# Altium PCB PCB1.PcbDoc
Units mm, origin at the board's own origin, x right, y up, seen from the top; angles counter-clockwise.
Board outline 35.79 x 36.37 mm, 6 copper layers (Top Layer, Layer 1, Layer 2, Layer 3, Layer 4, Bottom Layer), stack 1.509 mm thick; 3 components, 9 nets, 165 pads, 416 vias.
Unrouted connection lines stored in the file: 1.
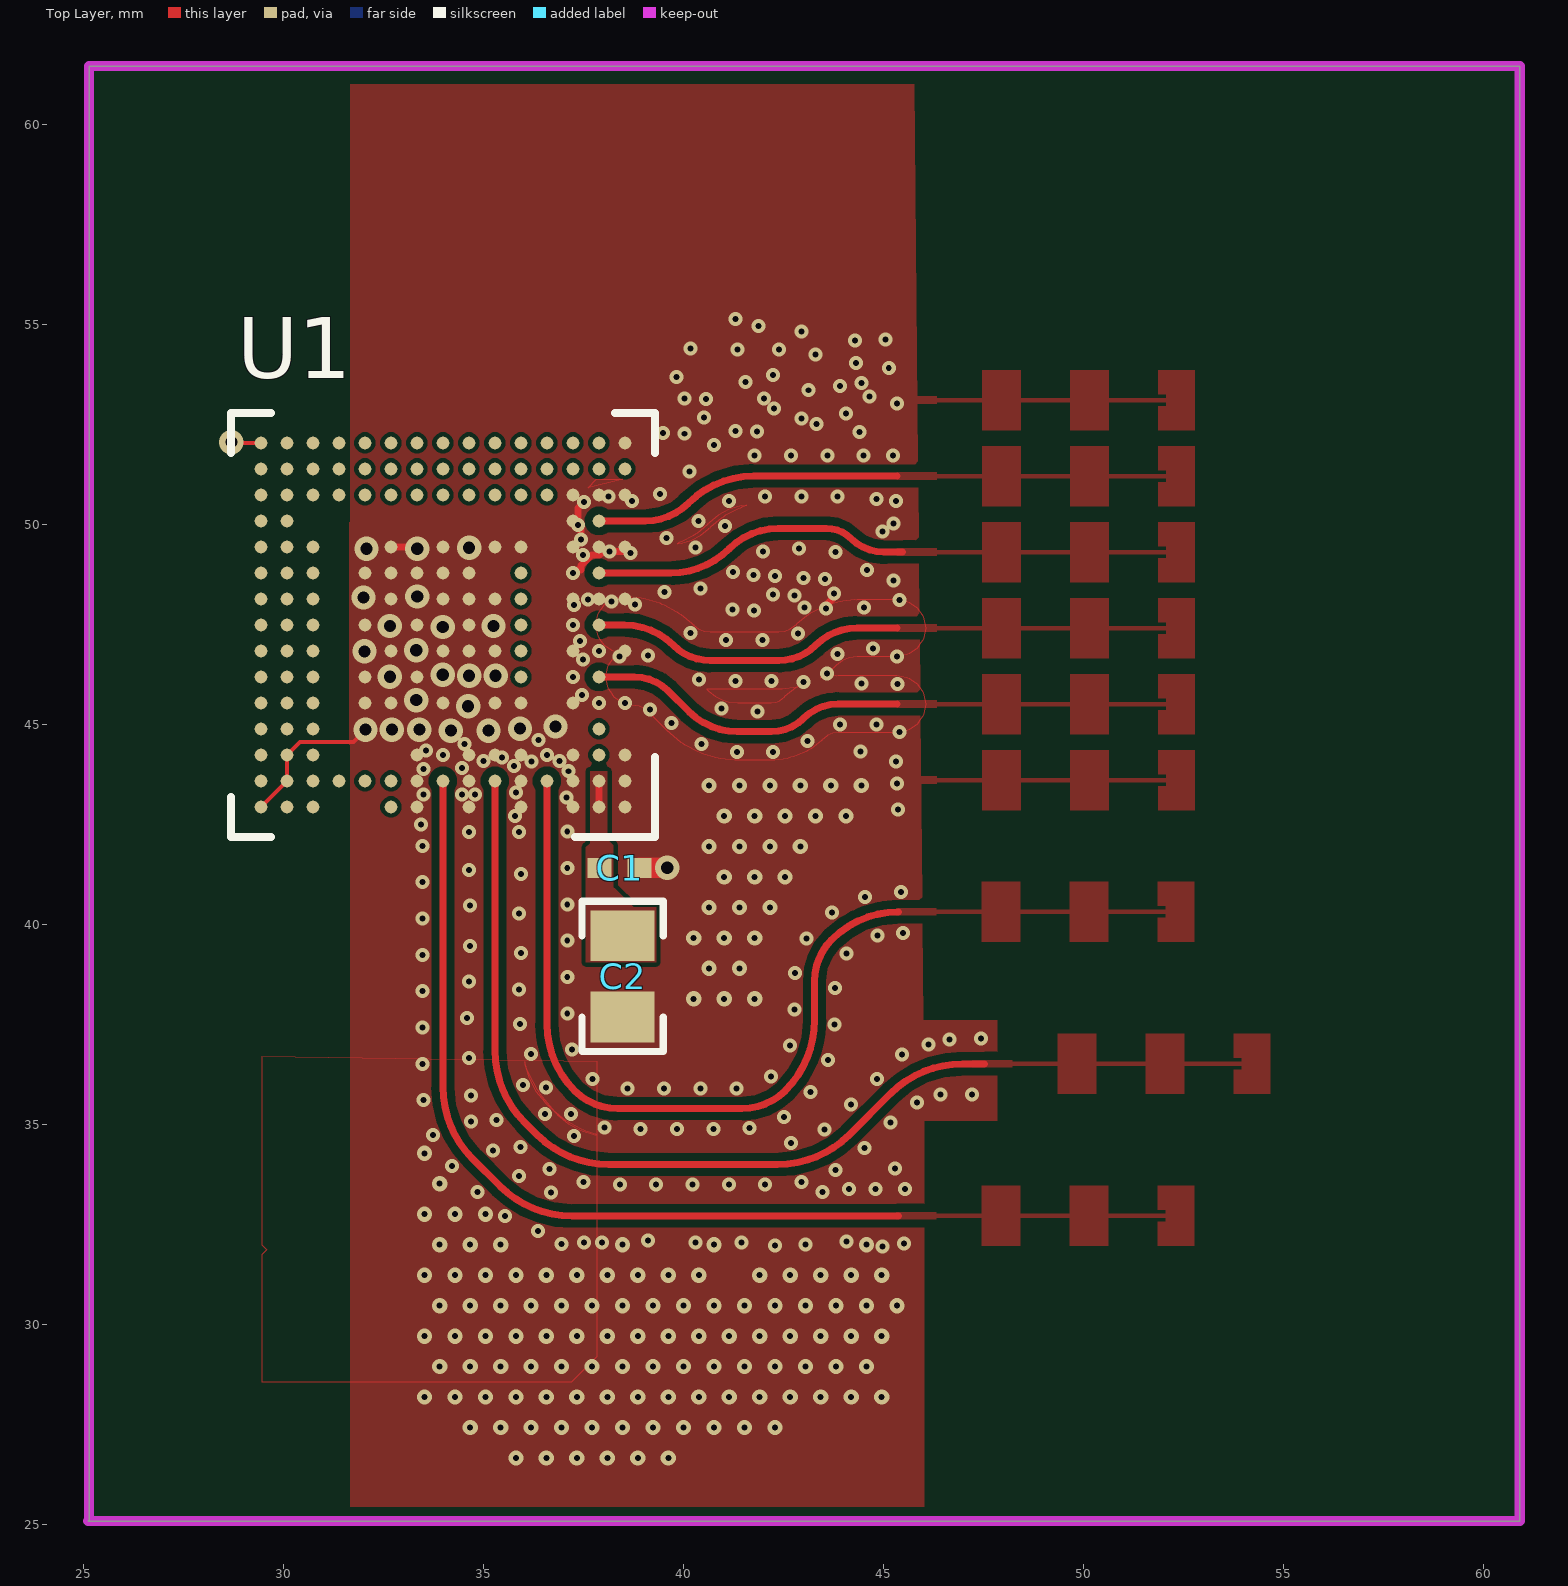
[diagram p0: Top Layer view]
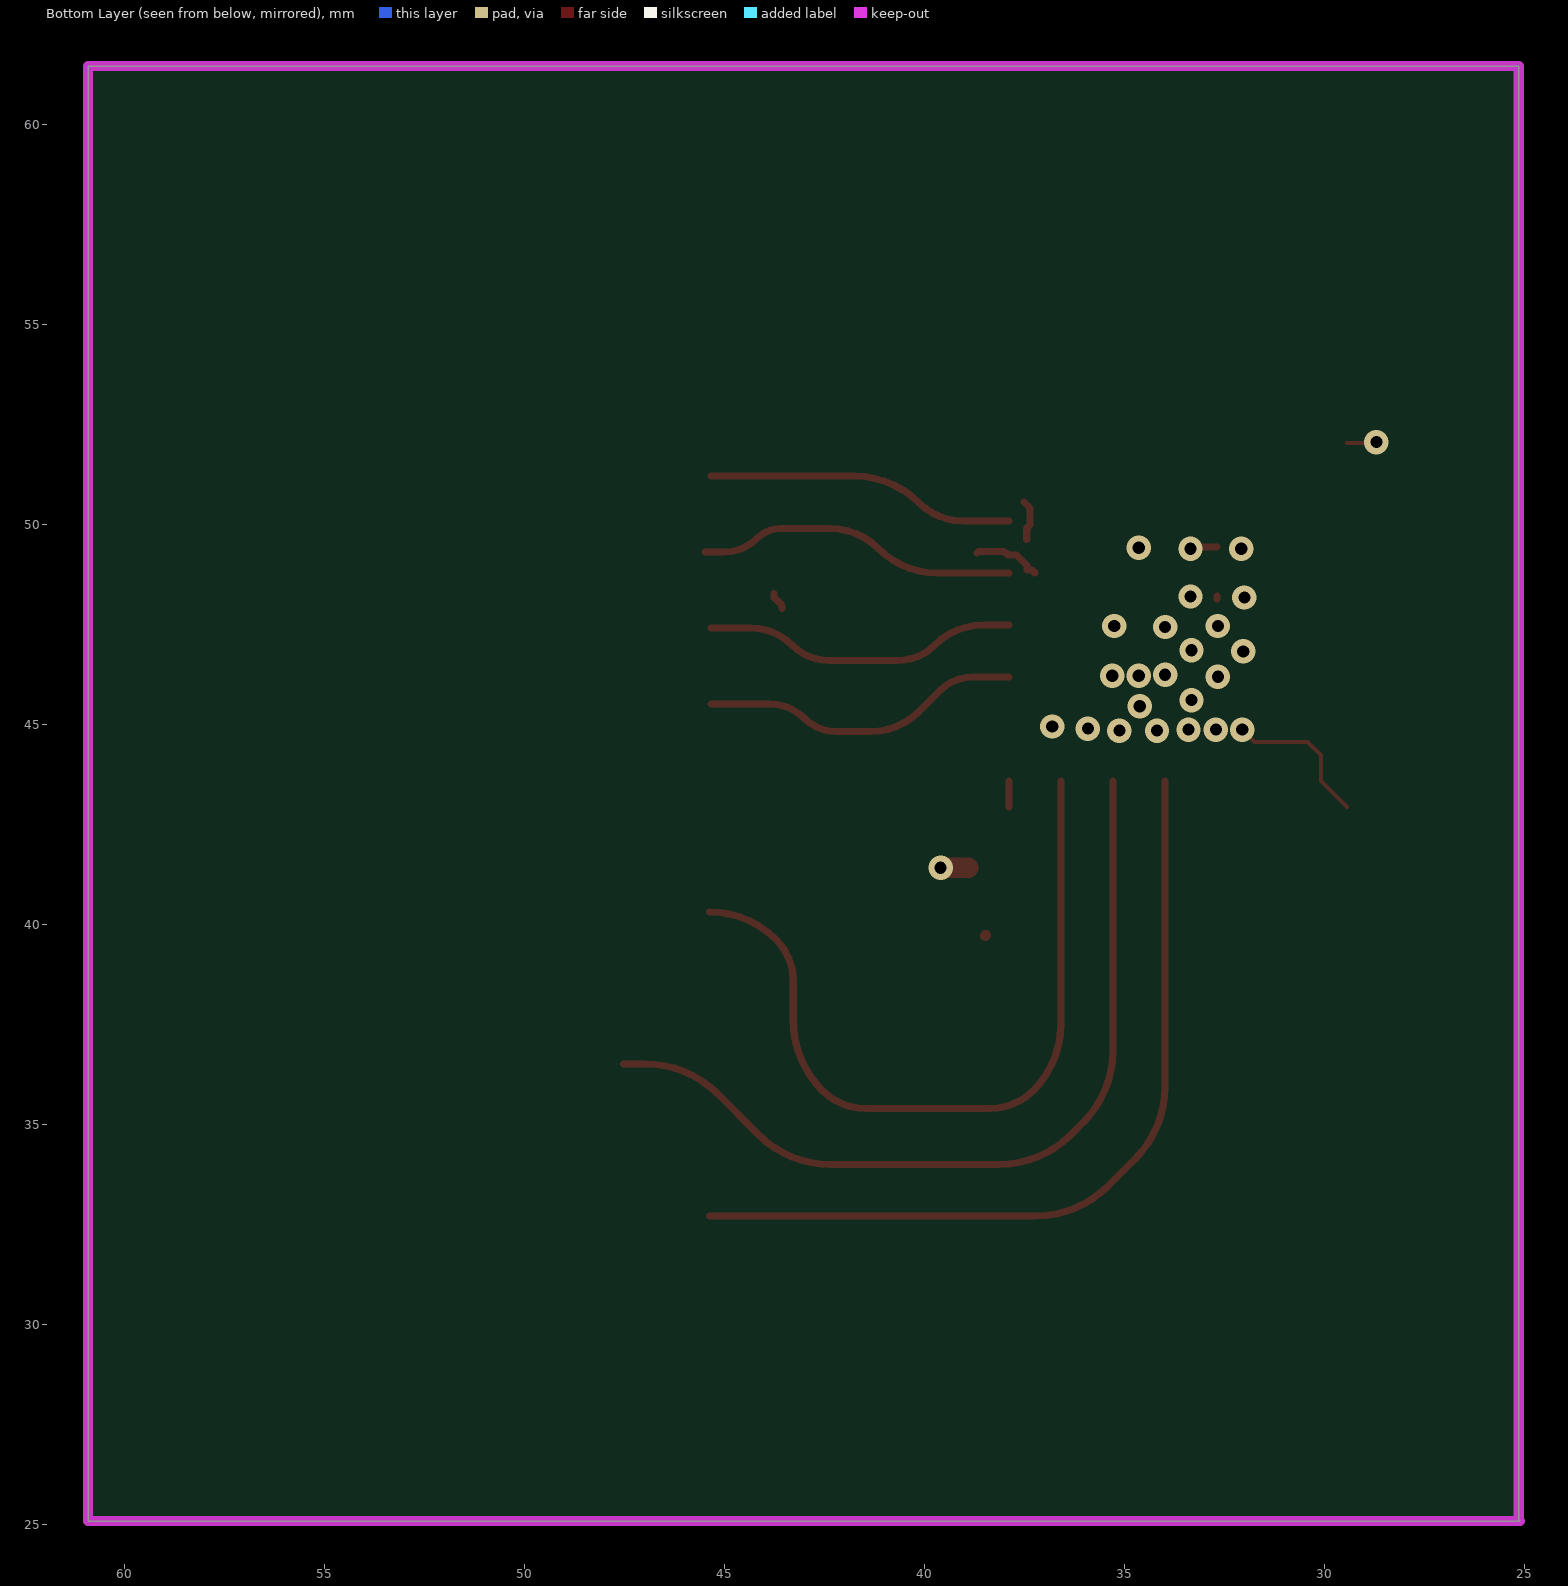
[diagram p1: Bottom Layer view, seen from below]
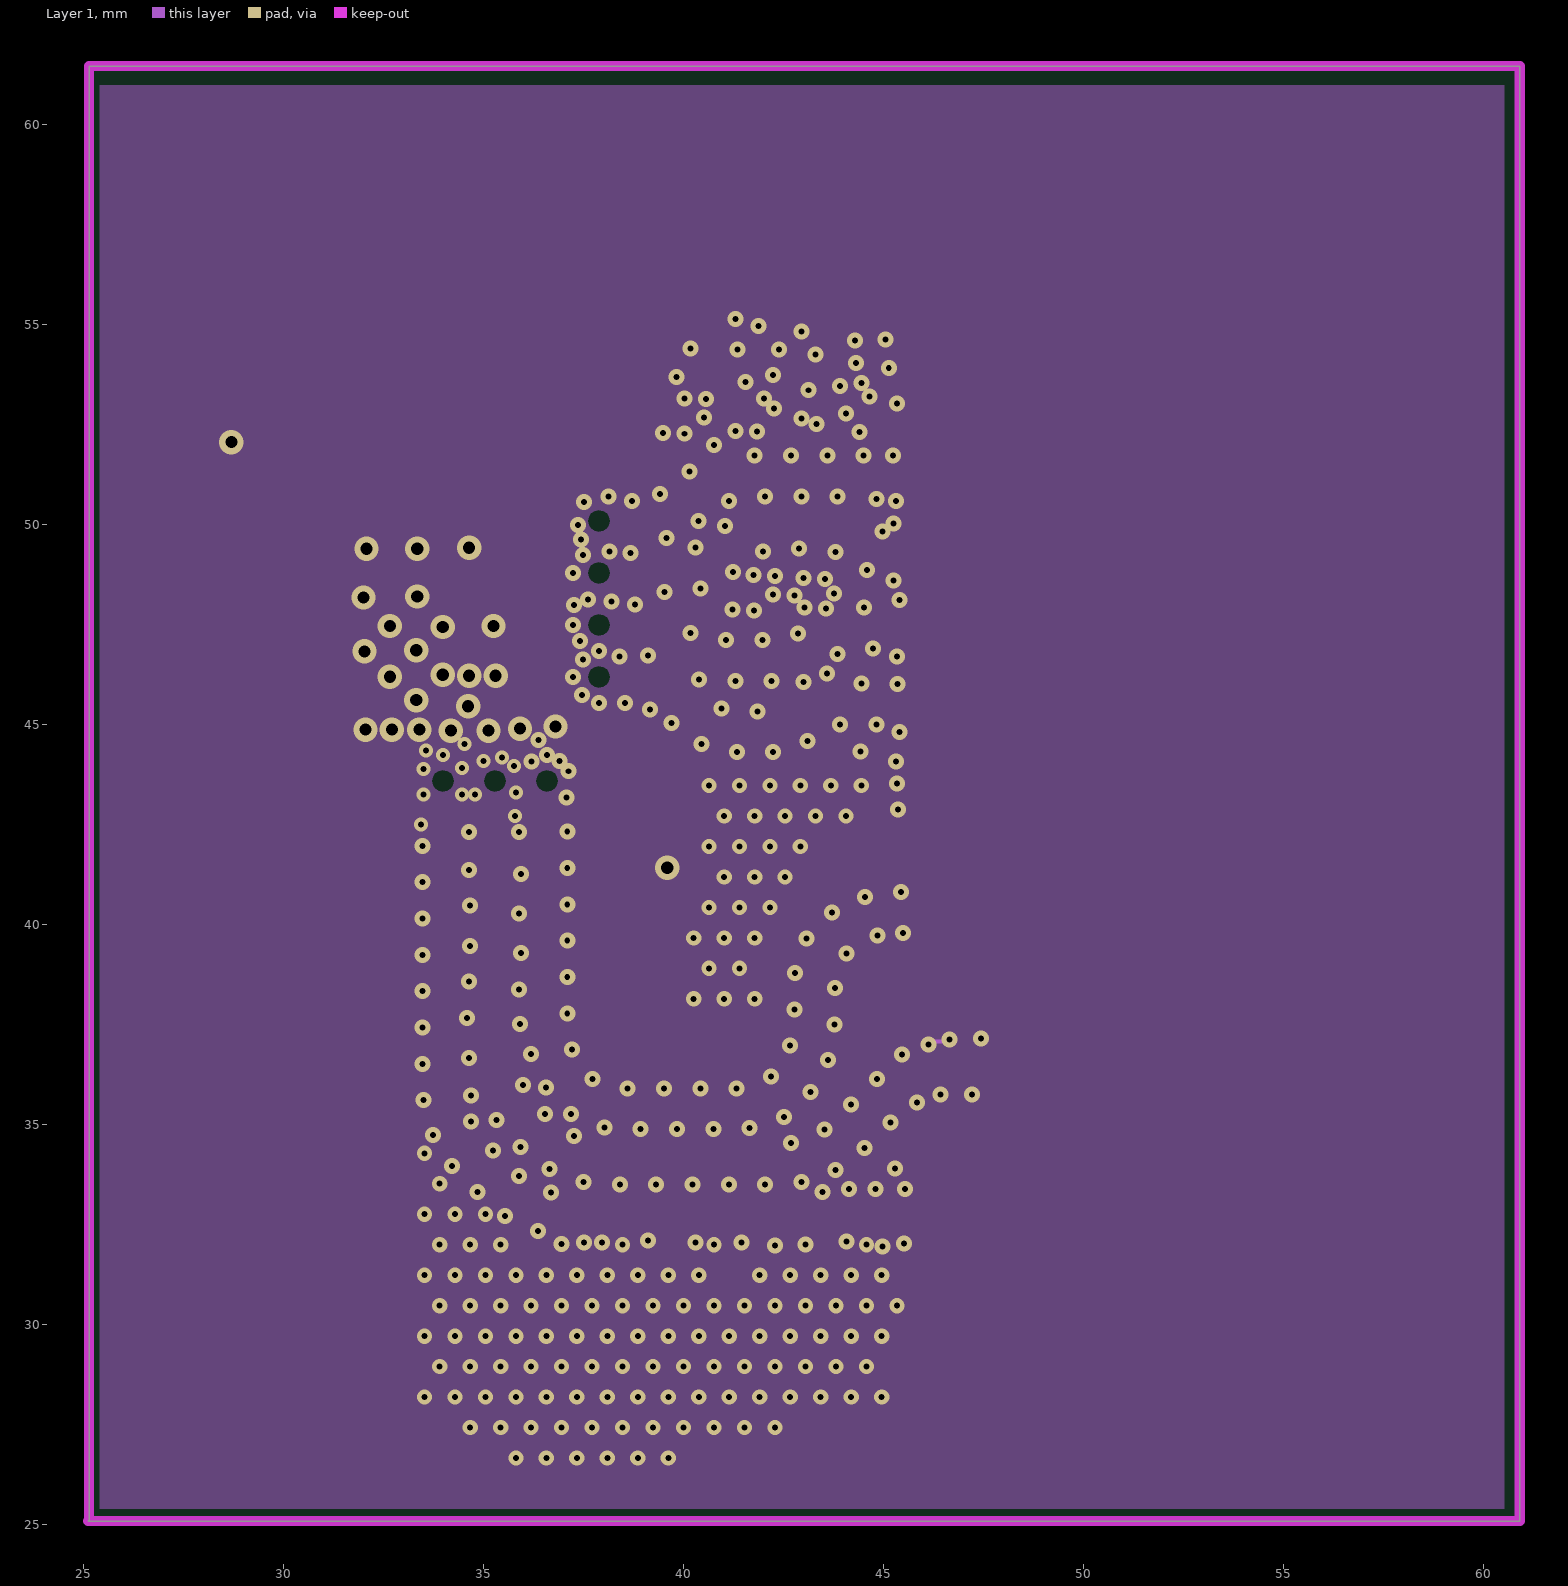
[diagram p2: Layer 1]

## Layer stack, top to bottom
Top Solder: solder mask 0.0203, SM-001, Dk 4
Top Layer: signal copper 0.0406
Dielectric 2: core 0.1016, roger, Dk 3.66
Layer 1: signal copper 0.0305
Dielectric6: dielectric 0.32, FR-4, Dk 4.8
Layer 2: signal copper 0.0305
Dielectric 1: core 0.7112, Core-043, Dk 4.3
Layer 3: signal copper 0.0305
Dielectric 5: prepreg 0.0711, PP-006, Dk 4.1
Layer 4: signal copper 0.0305
Dielectric 3: core 0.1016, 370, Dk 4.5
Bottom Layer: signal copper 0.0406
Bottom Solder: solder mask 0.0203, SM-001, Dk 4

## Board outline
25.121,25.095 25.146,25.121 25.146,61.468 60.909,61.468 60.909,25.095

## Design rules (kind name [scope] priority, off if disabled: settings)
Clearance "Stitching GND" [IsStitchingVia and InNet('GND') vs (IsVia and (Not IsStitchingVia)) Or IsPad] p1: gap=0.003 ignorepadtopadclearanceinfootprint=FALSE
Clearance [InNet('GND') vs InNetClass('RF')] p2: gap=0.203 ignorepadtopadclearanceinfootprint=FALSE
Clearance Clearance_1 [All] p3: gap=0.102 ignorepadtopadclearanceinfootprint=FALSE
PolygonConnect [All] p1: connectstyle=Relief reliefconductorwidth=0.254 reliefentries=4 polygonreliefangle="90 Angle" airgapwidth=0.254
RoutingVias [All] p1: holewidth=0.305 width=0.61 viastyle="Through Hole" minholewidth=0.127 minwidth=0.279 maxholewidth=0.711 maxwidth=1.27
SolderMaskExpansion [All] p1: expansion=0.102 istentingtop=FALSE
SupplyNets "Schematic Supply Nets" [InNet('GND')] p1: voltage=0.000
Width Width_1 [InNetClass('RF')] p1: maxlimit=0.254 minlimit=0.178 preferedwidth=0.254 toplayer_maxwidth=0.178 toplayer_prefwidth=0.178 midlayer1_minwidth=0.254 midlayer2_minwidth=0.254 midlayer3_minwidth=0.254 midlayer4_minwidth=0.254 bottomlayer_minwidth=0.254 minimp=50.000000 maximp=50.000000 favimp=50.000000
Width [All] p2: maxlimit=0.762 minlimit=0.102 preferedwidth=0.102 toplayer_prefwidth=0.178 midlayer1_maxwidth=0.102 midlayer2_maxwidth=0.102 midlayer3_maxwidth=0.102 midlayer4_maxwidth=0.102 bottomlayer_prefwidth=0.178 minimp=50.000000 maximp=50.000000 favimp=50.000000
30 further rules are at their usual default settings.

## Classes and differential pairs
net class RF: RX1 RX2 RX3 RX4 TX1 TX2 TX3

## Components (designator, comment, footprint, x,y, rotation, side; value= is the part's Value field where it differs from the comment)
C1 "GCM155R71C224KE02D" 0402L 38.405,41.427 r0 top value=0.22uF
C2 "GCM21BR71A106KE22L" 0805_HV 38.481,38.71 r270 top value=10uF
U1 "AWR1843ABL" ABL0161B 33.991,47.498 r180 top locked

## Footprints (in the part's own frame and the unit in brackets; to place one, negate y for a bottom-side part, rotate by r counter-clockwise, add the part's x,y. Pads: shape width x height; smd on the part's side, far side on the other; paste and mask are expansions set on the pad)
0402L [mm] "0402 from SM-752 data"
  rect 0.6x0.5 smd: 1(-0.5,0) 2(0.5,0)
  body extent -0.55,-0.3 0.55,0.3, height 0.6
0805_HV [mil] "0805 with 30mil clearance between pads"
  rect 50x63 smd: 1(-40,0) 2(40,0)
  silkscreen extent -74,-40 74,40, body extent -43,-29 43,29, height 57
ABL0161B [mm] "BGA, 161-Balls, Body 10.4x10.4mm, Pitch 0.65mm"
  round 0.32 smd mask+0: A1(-4.55,4.55) A2(-3.9,4.55) A3(-3.25,4.55) A5(-1.95,4.55) A7(-0.65,4.55) A9(0.65,4.55) A10(1.3,4.55) A13(3.25,4.55) A14(3.9,4.55) A15(4.55,4.55) B1(-4.55,3.9) B2(-3.9,3.9) B3(-3.25,3.9) B4(-2.6,3.9) B5(-1.95,3.9) B6(-1.3,3.9) B7(-0.65,3.9) B8(0,3.9) B9(0.65,3.9) B10(1.3,3.9) B11(1.95,3.9) B12(2.6,3.9) B13(3.25,3.9) B14(3.9,3.9) B15(4.55,3.9) C1(-4.55,3.25) C2(-3.9,3.25) C3(-3.25,3.25) C4(-2.6,3.25) C5(-1.95,3.25) C6(-1.3,3.25) C7(-0.65,3.25) C8(0,3.25) C9(0.65,3.25) C13(3.25,3.25) C14(3.9,3.25) C15(4.55,3.25) D2(-3.9,2.6) D13(3.25,2.6) D14(3.9,2.6) D15(4.55,2.6) E1(-4.55,1.95) E2(-3.9,1.95) E3(-3.25,1.95) E5(-1.95,1.95) E6(-1.3,1.95) E8(0,1.95) E10(1.3,1.95) E11(1.95,1.95) E13(3.25,1.95) E14(3.9,1.95) E15(4.55,1.95) F2(-3.9,1.3) F3(-3.25,1.3) F5(-1.95,1.3) F9(0.65,1.3) F11(1.95,1.3) F13(3.25,1.3) F14(3.9,1.3) F15(4.55,1.3) G1(-4.55,0.65) G2(-3.9,0.65) G3(-3.25,0.65) G5(-1.95,0.65) G6(-1.3,0.65) G7(-0.65,0.65) G8(0,0.65) G10(1.3,0.65) G13(3.25,0.65) G14(3.9,0.65) G15(4.55,0.65) H2(-3.9,0) H3(-3.25,0) H5(-1.95,0) H7(-0.65,0) H9(0.65,0) H11(1.95,0) H13(3.25,0) H14(3.9,0) H15(4.55,0) J1(-4.55,-0.65) J2(-3.9,-0.65) J3(-3.25,-0.65) J5(-1.95,-0.65) J6(-1.3,-0.65) J7(-0.65,-0.65) J8(0,-0.65) J10(1.3,-0.65) J13(3.25,-0.65) J14(3.9,-0.65) J15(4.55,-0.65) K2(-3.9,-1.3) K3(-3.25,-1.3) K5(-1.95,-1.3) K7(-0.65,-1.3) K8(0,-1.3) K9(0.65,-1.3) K10(1.3,-1.3) K11(1.95,-1.3) K13(3.25,-1.3) K14(3.9,-1.3) K15(4.55,-1.3) L1(-4.55,-1.95) L2(-3.9,-1.95) L3(-3.25,-1.95) L5(-1.95,-1.95) L6(-1.3,-1.95) L8(0,-1.95) L10(1.3,-1.95) L13(3.25,-1.95) L14(3.9,-1.95) L15(4.55,-1.95) M2(-3.9,-2.6) M3(-3.25,-2.6) M14(3.9,-2.6) M15(4.55,-2.6) N1(-4.55,-3.25) N2(-3.9,-3.25) N3(-3.25,-3.25) N4(-2.6,-3.25) N5(-1.95,-3.25) N6(-1.3,-3.25) N7(-0.65,-3.25) N8(0,-3.25) N9(0.65,-3.25) N10(1.3,-3.25) N11(1.95,-3.25) N12(2.6,-3.25) N13(3.25,-3.25) N14(3.9,-3.25) N15(4.55,-3.25) P1(-4.55,-3.9) P2(-3.9,-3.9) P3(-3.25,-3.9) P4(-2.6,-3.9) P5(-1.95,-3.9) P6(-1.3,-3.9) P7(-0.65,-3.9) P8(0,-3.9) P9(0.65,-3.9) P10(1.3,-3.9) P11(1.95,-3.9) P12(2.6,-3.9) P13(3.25,-3.9) P14(3.9,-3.9) P15(4.55,-3.9) R1(-4.55,-4.55) R2(-3.9,-4.55) R3(-3.25,-4.55) R4(-2.6,-4.55) R5(-1.95,-4.55) R6(-1.3,-4.55) R7(-0.65,-4.55) R8(0,-4.55) R9(0.65,-4.55) R10(1.3,-4.55) R11(1.95,-4.55) R12(2.6,-4.55) R13(3.25,-4.55) R14(3.9,-4.55) R15(4.55,-4.55)
  silkscreen extent -5.3,-5.3 5.3,5.3, body extent -5.4,-5.4 5.4,5.4, height 1.17

## Part data
C1: library part CMP-0078265-1, "CAP, CERM, 0.22 µF, 16 V,+/- 10%, X7R, AEC-Q200 Grade 1, 0402", Cap_Case=0402, Manufacturer=MuRata, Supplier Part Number 1=490-10671-1-ND, TempCo=X7R, Tolerance_%=10%, Value2=16V, ValueDisplayed=0.22µF, AEC Category=Q200, AEC Grade=1, AEC Qualified=Y, Cap_F=220nF, ComponentLink1Description="Datasheet link", ComponentLink1URL=http://psearch.en.murata.com/capacitor/product/GCM155R71C224KE02%23.pdf, CompType=Capacitor, MountType=SMT, PackageReference=0402, PartNumber=GCM155R71C224KE02D, Polarized=N, RoHS=Y, SizeArea_mm2=0.5, SizeAreaWB_mm2=3, SizeX_mm=1, SizeY_mm=0.5, SizeZ_mm=0.6, Supplier 1=Digi-Key, Supplier 2=Mouser, Supplier Part Number 2=81-GCM155R71C224KE2D, TaMax_C=125°C, TaMin_C=-55°C, Technology=Ceramic, U/M=EA, VDC_V=16V
C2: library part CMP-0008017-2, "CAP, CERM, 10 uF, 10 V, +/- 10%, X7R, 0805", Cap_Case=0805, Manufacturer=MuRata, Supplier Part Number 1=490-10674-1-ND, TempCo=X7R, Tolerance_%=10%, Value1=Unknown, Value2=10V, ValueDisplayed=10uF, AEC Category=Q200, AEC Qualified=?, Cap_F=10µF, ComponentLink1Description="Datasheet link", ComponentLink1URL=http://www.murata.com/products/catalog/pdf/c03e.pdf, CompType=Capacitor, LatestRevisionDate=2017-03-09, MountType=SMT, PackageReference=0805, PartNumber=GCM21BR71A106KE22L, Polarized=N, Published=2008-06-19, Publisher="Texas Instruments", RoHS=Y, SizeArea_mm2=2.5, SizeAreaWB_mm2=6.75, SizeX_mm=2, SizeY_mm=1.25, SizeZ_mm=1.45, Supplier 1=Digi-Key, Supplier 2=Newark, Supplier 3=Mouser, Supplier Part Number 2=06AC6014, Supplier Part Number 3=81-GCM21BR71A106KE2L, TaMax_C=125°C, TaMin_C=-55°C, Technology=Ceramic, U/M=EA, VDC_V=10V
U1: library part CMP-0078239-1, "AWR1843ABL, ABL0161B (FCBGA-161)", Alternate Manufacturer="Texas Instruments", AEC Category=Q200, AEC Qualified=N, ComponentLink1Description="Datasheet Link", ComponentLink1URL=https://sps16.itg.ti.com/sites/KMS/crossdivteams/altium/docs/AWR1843_ballout_05Sep17.xlsx, ComponentLink2Description="Product Folder", ComponentLink2URL=TBD, CompType=IC, Manufacturer="Texas Instruments", MountType=SMT, PackageDescription=FCBGA-161, PackageReference=ABL0161B, PartId=1, PartNumber=AWR1843ABL, SizeArea_mm2=108.16, SizeAreaWB_mm2=153.76, SizeX_mm=10.4, SizeY_mm=10.4, SizeZ_mm=1.17

## Via types
v1: diameter 0.35/0.4 (per signal layer), hole 0.15, Top Layer to Layer 1, 237 vias
v2: diameter 0.381, hole 0.15, Top Layer to Layer 1, 134 vias
v3: diameter 0.61, hole 0.305, Top Layer to Bottom Layer, 25 vias
v4: diameter 0.35, hole 0.15, Top Layer to Layer 1, tented both sides, 12 vias
v5: diameter 0.35/0.4 (per signal layer), hole 0.15, Top Layer to Layer 1, tented top, 4 vias
v6: diameter 0.35, hole 0.15, Top Layer to Layer 1, 2 vias
v7: diameter 0.35/0.4 (per signal layer), hole 0.15, Top Layer to Layer 1, tented both sides, 1 vias
v8: diameter 0.381, hole 0.15, Top Layer to Layer 1, tented top, 1 vias

## Nets (pads, with @x,y where several pads share a name; then routed paths per layer and width w, separated by ;. In a path a pad name is that pad's centre, name@x,y a point inside that pad or via, vN(x,y) a via of type N, cw(c..) or ccw(c..) an arc to the next point about the centre after c; other vN are vias at no path point)
GND: C1.2 C2.2 U1.A1 U1.A3 U1.A5 U1.A7 U1.A9 U1.A13 U1.A15 U1.B1 U1.B3 U1.B5 U1.B7 U1.B9 U1.B14 U1.C1 U1.C3 U1.C4 U1.C5 U1.C6 U1.C7 U1.C8 U1.C9 U1.C14 U1.E1 U1.E2 U1.E3 U1.E5 U1.E6 U1.E8 U1.E10 U1.E11 U1.F3 U1.F9 U1.F11 U1.G1 U1.G2 U1.G3 U1.G6 U1.G7 U1.G8 U1.G10 U1.H3 U1.H7 U1.H9 U1.H11 U1.J1 U1.J2 U1.J3 U1.J6 U1.J7 U1.J8 U1.J10 U1.K3 U1.K7 U1.K8 U1.K9 U1.K10 U1.K11 U1.L1 U1.L2 U1.L3 U1.L5 U1.L6 U1.L8 U1.L10 U1.M3 U1.N1 U1.N2 U1.N3 U1.R1 U1.R15 | length 10
  Top Layer w0.102: v3(28.702,52.07) 28.724,52.048 U1.R15 ; U1.A15 U1.B14 U1.C14 30.42,44.577 31.75,44.577 v3(32.055,44.882)
  Top Layer w0.178: U1.J10 U1.J10@32.691,48.222 ; U1.L10 33.305,49.448 v3(33.35,49.403) ; v1(37.244,48.803) 37.312,48.87 37.439,48.87 37.439,48.985 37.704,49.25 37.908,49.25 37.959,49.301 37.982,49.301 38.012,49.331 38.654,49.331 v1(38.684,49.301) ; v1(37.443,49.636) 37.443,49.913 v1(37.363,49.993) 37.363,50.419 v1(37.516,50.571) ; v1(43.564,47.909) 43.564,47.988 43.764,48.188 v1(43.764,48.285)
  Top Layer w0.508: C1.2 v3(39.599,41.427)
  Layer 1 w0.102: v1(46.126,37.008) 46.202,37.083 v1@46.477,37.083 ; v1@46.477,37.083 46.608,37.083 v1(46.66,37.135) 46.528,37.135 v1@46.477,37.083
  other v1: 44.983,31.953 42.291,31.979 43.053,32.004 36.958,32.025 45.517,32.029 37.516,32.055 37.973,32.055 40.31,32.055 41.453,32.055 44.074,32.08 39.116,32.106 36.363,32.342 35.539,32.725 36.693,33.303 34.851,33.317 43.485,33.325 44.145,33.401 44.806,33.401 45.542,33.401 38.414,33.503 39.322,33.503 40.23,33.503 41.138,33.503 42.046,33.503 37.509,33.575 42.952,33.567 35.89,33.727 36.658,33.891 43.807,33.874 45.288,33.909 34.22,33.97 35.241,34.362 44.533,34.418 35.936,34.441 42.688,34.546 37.263,34.718 33.74,34.741 38.933,34.9 39.841,34.9 40.749,34.9 43.529,34.89 38.026,34.931 41.657,34.917 45.175,35.06 34.692,35.085 35.33,35.118 42.52,35.199 36.542,35.27 37.186,35.277 44.191,35.511 45.847,35.56 33.507,35.618 34.696,35.738 46.431,35.763 47.219,35.763 43.183,35.819 38.609,35.915 39.517,35.915 40.425,35.915 41.333,35.915 36.563,35.937 35.993,35.993 37.73,36.141 44.836,36.15 42.191,36.213 33.484,36.526 43.612,36.619 34.646,36.678 36.192,36.766 45.466,36.754 37.214,36.888 42.666,36.987 47.447,37.16 33.484,37.434 35.916,37.516 43.785,37.511 34.595,37.668 37.098,37.788 42.774,37.889 33.484,38.342 35.89,38.379 43.788,38.419 34.646,38.583 37.098,38.696 42.791,38.797 33.484,39.25 44.074,39.28 35.941,39.294 34.671,39.472 37.098,39.604 43.085,39.656 44.859,39.737 45.491,39.802 33.484,40.158 35.89,40.284 43.722,40.304 34.671,40.488 37.098,40.512 44.539,40.699 45.438,40.824 33.484,41.066 35.941,41.275 34.646,41.377 37.098,41.42 33.484,41.974 34.646,42.316 35.89,42.316 37.098,42.328 45.373,42.886 37.084,43.18 45.339,43.531 45.322,44.08 41.337,44.325 42.245,44.325 44.433,44.334 40.449,44.516 43.11,44.601 45.398,44.816 43.919,45.014 44.827,45.014 39.71,45.043 41.854,45.338 39.167,45.39 40.949,45.411 37.891,45.548 38.541,45.548 37.465,45.745 44.449,46.028 45.357,46.025 43.002,46.076 41.302,46.102 42.21,46.102 40.394,46.13 37.241,46.198 43.586,46.279 37.49,46.634 37.49,46.634 38.405,46.711 45.339,46.705 39.116,46.736 43.85,46.776 37.891,46.848 44.747,46.914 37.418,47.096 41.069,47.116 41.977,47.116 40.178,47.294 42.869,47.286 37.241,47.498 41.761,47.858 41.224,47.879 43.028,47.93 44.522,47.928 37.262,47.999 38.789,48.011 38.205,48.087 37.617,48.133 45.398,48.126 42.777,48.239 42.24,48.26 39.53,48.319 40.433,48.409 45.254,48.605 43.539,48.646 43.002,48.666 42.294,48.722 41.758,48.743 41.242,48.821 44.587,48.871 37.49,49.251 38.154,49.331 41.99,49.337 43.8,49.324 42.895,49.404 40.307,49.434 39.584,49.669 44.98,49.832 41.039,49.972 45.252,50.038 40.385,50.097 38.713,50.601 41.14,50.601 45.314,50.597 44.831,50.648 38.129,50.703 42.041,50.714 42.949,50.714 43.857,50.714 39.421,50.775 40.157,51.333 41.783,51.728 42.691,51.728 43.599,51.728 44.507,51.728 45.237,51.74 40.767,51.994 40.034,52.278 39.497,52.299 41.837,52.329 44.399,52.324 41.3,52.349 43.332,52.527 42.951,52.654 40.513,52.68 44.069,52.781 42.266,52.908 45.339,53.031 40.567,53.141 40.03,53.162 42.012,53.162 44.653,53.213 43.129,53.365 43.917,53.467 44.45,53.543 41.554,53.569 39.827,53.696 42.24,53.746 45.136,53.924 44.323,54.051 43.307,54.254 41.351,54.381 42.393,54.381 40.183,54.407 44.298,54.61 45.06,54.635 42.951,54.839 41.885,54.966 41.3,55.143
  other v2: 35.814,26.67 36.576,26.67 37.338,26.67 38.1,26.67 38.862,26.67 39.624,26.67 34.671,27.432 35.433,27.432 36.195,27.432 36.957,27.432 37.719,27.432 38.481,27.432 39.243,27.432 40.005,27.432 40.767,27.432 41.529,27.432 42.291,27.432 33.528,28.194 34.29,28.194 35.052,28.194 35.814,28.194 36.576,28.194 37.338,28.194 38.1,28.194 38.862,28.194 39.624,28.194 40.386,28.194 41.148,28.194 41.91,28.194 42.672,28.194 43.434,28.194 44.196,28.194 44.958,28.194 33.909,28.956 34.671,28.956 35.433,28.956 36.195,28.956 36.957,28.956 37.719,28.956 38.481,28.956 39.243,28.956 40.005,28.956 40.767,28.956 41.529,28.956 42.291,28.956 43.053,28.956 43.815,28.956 44.577,28.956 33.528,29.718 34.29,29.718 35.052,29.718 35.814,29.718 36.576,29.718 37.338,29.718 38.1,29.718 38.862,29.718 39.624,29.718 40.386,29.718 41.148,29.718 41.91,29.718 42.672,29.718 43.434,29.718 44.196,29.718 44.958,29.718 33.909,30.48 34.671,30.48 35.433,30.48 36.195,30.48 36.957,30.48 37.719,30.48 38.481,30.48 39.243,30.48 40.005,30.48 40.767,30.48 41.529,30.48 42.291,30.48 43.053,30.48 43.815,30.48 44.577,30.48 45.339,30.48 33.528,31.242 34.29,31.242 35.052,31.242 35.814,31.242 36.576,31.242 37.338,31.242 38.1,31.242 38.862,31.242 39.624,31.242 40.386,31.242 41.91,31.242 42.672,31.242 43.434,31.242 44.196,31.242 44.958,31.242 33.909,32.004 34.671,32.004 35.433,32.004 38.481,32.004 40.767,32.004 44.577,32.004 33.528,32.766 34.29,32.766 35.052,32.766 33.909,33.528 33.528,34.29 40.259,38.151 41.021,38.151 41.783,38.151 40.64,38.913 41.402,38.913 41.021,39.675 41.783,39.675 40.64,40.437 41.402,40.437 42.164,40.437 41.021,41.199 41.783,41.199 42.545,41.199 40.64,41.961 41.402,41.961 42.164,41.961 42.926,41.961 41.021,42.723 41.783,42.723 42.545,42.723 43.307,42.723 44.069,42.723 40.64,43.485 41.402,43.485 42.164,43.485 42.926,43.485 43.688,43.485 44.45,43.485
  other v3: 34.188,44.856 35.128,44.856 32.715,44.882 33.401,44.882 35.916,44.907 36.805,44.958 34.62,45.466 33.325,45.618 32.664,46.203 34.646,46.228 35.306,46.228 33.985,46.253 32.029,46.838 33.325,46.863 33.985,47.447 32.664,47.473 35.255,47.473 32.004,48.184 33.35,48.209 32.08,49.403 34.646,49.428
  other v4: 33.437,42.51 33.503,43.256 34.468,43.256 34.798,43.256 33.503,43.891 34.468,43.917 35.763,43.967 35.001,44.094 35.469,44.187 33.991,44.248 33.564,44.365 34.529,44.517
  other v5: 37.135,43.84 36.906,44.094 36.591,44.248 36.383,44.619
  other v6: 35.789,42.723 35.814,43.307
  other v7: 36.205,44.085
  other v8: 40.259,39.675
NetC1_1: C1.1 C2.1 U1.A2 U1.B2 | length 0.7
  Top Layer w0.178: U1.A2 U1.B2
  Top Layer w0.254: C2.1@38.467,39.739 C2.1
RX1: U1.M2 | length 7.7
  Top Layer w0.178: U1.M2 39.05,50.098 ccw(c39.05,51.628) 40.132,50.546 cw(c41.762,48.916) 41.762,51.221 45.339,51.221
RX2: U1.K2 | length 8
  Top Layer w0.178: U1.K2 39.687,48.798 ccw(c39.687,50.864) 41.148,49.403 cw(c42.374,48.177) 42.374,49.911 43.583,49.911 cw(c43.583,49.044) 44.196,49.657 ccw(c45.007,50.468) 45.007,49.321 ; 45.007,49.321 45.484,49.321
RX3: U1.H2 | length 7.9
  Top Layer w0.178: U1.H2 38.525,47.498 cw(c38.525,45.764) 39.751,46.99 ccw(c40.671,47.91) 40.671,46.609 42.387,46.609 ccw(c42.387,47.91) 43.307,46.99 cw(c44.348,45.949) 44.348,47.421 45.339,47.421
RX4: U1.F2 | length 8.1
  Top Layer w0.178: U1.F2 38.777,46.198 cw(c38.777,45) 39.624,45.847 40.138,45.333 ccw(c41.349,46.544) 41.349,44.831 42.208,44.831 ccw(c42.208,45.952) 43,45.159 cw(c43.874,44.286) 43.874,45.521 45.339,45.521
TX1: U1.B4 | length 21.1
  Top Layer w0.178: U1.B4 36.591,37.525 ccw(c38.955,37.525) 37.283,35.853 ccw(c38.359,36.929) 38.359,35.408 40.807,35.408 ; 39.121,35.408 41.465,35.408 ccw(c41.465,36.944) 42.552,35.858 ccw(c40.791,37.618) 43.281,37.618 43.281,38.592 cw(c44.755,38.592) 43.713,39.635 cw(c45.378,37.97) 45.378,40.325
TX2: U1.B6 | length 21.4
  Top Layer w0.178: U1.B6 35.291,36.856 ccw(c37.831,36.856) 36.035,35.06 36.34,34.755 ccw(c38.136,36.551) 38.136,34.011 42.356,34.011 ccw(c42.356,36.551) 44.153,34.755 45.179,35.781 cw(c46.975,33.985) 46.975,36.525 47.523,36.525
TX3: U1.B8 | length 20.8
  Top Layer w0.178: U1.B8 33.991,35.946 ccw(c36.531,35.946) 34.735,34.15 35.416,33.468 ccw(c37.212,35.264) 37.212,32.724 45.378,32.724
pads on no net: U1.A10 U1.A14 U1.B10 U1.B11 U1.B12 U1.B13 U1.B15 U1.C2 U1.C13 U1.C15 U1.D2 U1.D13 U1.D14 U1.D15 U1.E13 U1.E14 U1.E15 U1.F5 U1.F13 U1.F14 U1.F15 U1.G5 U1.G13 U1.G14 U1.G15 U1.H5 U1.H13 U1.H14 U1.H15 U1.J5 U1.J13 U1.J14 U1.J15 U1.K5 U1.K13 U1.K14 U1.K15 U1.L13 U1.L14 U1.L15 U1.M14 U1.M15 U1.N4 U1.N5 U1.N6 U1.N7 U1.N8 U1.N9 U1.N10 U1.N11 U1.N12 U1.N13 U1.N14 U1.N15 U1.P1 U1.P2 U1.P3 U1.P4 U1.P5 U1.P6 U1.P7 U1.P8 U1.P9 U1.P10 U1.P11 U1.P12 U1.P13 U1.P14 U1.P15 U1.R2 U1.R3 U1.R4 U1.R5 U1.R6 U1.R7 U1.R8 U1.R9 U1.R10 U1.R11 U1.R12 U1.R13 U1.R14

## Polygon pours and split planes (outlines as drawn)
GND on Top Layer "Top Layer-GND 1" (solid, pour order 79): 41.58,50.489 41.452,50.476 41.153,50.386 40.878,50.239 40.644,50.047 40.639,50.039 40.615,50.023 40.613,50.021 40.594,49.998 40.347,49.796 40.294,49.767 40.246,49.728 39.965,49.578 39.907,49.56 39.853,49.532 39.843,49.529 39.951,49.539 40.204,49.616 40.438,49.741 40.635,49.903 40.64,49.911 40.662,49.925 40.667,49.929 40.685,49.952 40.963,50.179 41.017,50.208 41.064,50.247 41.381,50.416 41.439,50.434 41.493,50.463
GND on Top Layer "GND_L01_P039" (solid, pour order 39): 39.497,61.021 45.776,61.01 46.001,37.617 47.854,37.617 47.854,35.103 46.025,35.103 46.025,25.451 31.674,25.451 31.674,61.021
RX1 on Top Layer "RX1_L01_P003" (solid, pour order 3): 50.639,51.971 49.669,51.971 49.669,51.271 48.439,51.271 48.439,51.971 47.469,51.971 47.469,51.271 46.339,51.271 46.339,51.311 45.339,51.311 45.339,51.131 46.339,51.131 46.339,51.171 47.469,51.171 47.469,50.471 48.439,50.471 48.439,51.171 49.669,51.171 49.669,50.471 50.639,50.471 50.639,51.171 52.07,51.171 52.07,51.071 51.869,51.071 51.869,50.471 52.789,50.471 52.789,51.971 51.869,51.971 51.869,51.371 52.07,51.371 52.07,51.271 50.639,51.271 50.639,51.971
RX2 on Top Layer "TOP-RX2" (solid, pour order 2): 50.639,50.071 49.669,50.071 49.669,49.371 48.439,49.371 48.439,50.071 47.469,50.071 47.469,49.371 46.339,49.371 46.339,49.411 45.339,49.411 45.339,49.231 46.339,49.231 46.339,49.271 47.469,49.271 47.469,48.571 48.439,48.571 48.439,49.271 49.669,49.271 49.669,48.571 50.639,48.571 50.639,49.271 52.07,49.271 52.07,49.171 51.869,49.171 51.869,48.571 52.789,48.571 52.789,50.071 51.869,50.071 51.869,49.471 52.07,49.471 52.07,49.371 50.639,49.371 50.639,50.071
RX4 on Top Layer "TOP-RX4" (solid, pour order 0): 50.639,46.271 49.669,46.271 49.669,45.571 48.439,45.571 48.439,46.271 47.469,46.271 47.469,45.571 46.339,45.571 46.339,45.611 45.339,45.611 45.339,45.431 46.339,45.431 46.339,45.471 47.469,45.471 47.469,44.771 48.439,44.771 48.439,45.471 49.669,45.471 49.669,44.771 50.639,44.771 50.639,45.471 52.07,45.471 52.07,45.371 51.869,45.371 51.869,44.771 52.789,44.771 52.789,46.271 51.869,46.271 51.869,45.671 52.07,45.671 52.07,45.571 50.639,45.571 50.639,46.271
RX3 on Top Layer "TOP-RX3" (solid, pour order 1): 50.639,48.171 49.669,48.171 49.669,47.471 48.439,47.471 48.439,48.171 47.469,48.171 47.469,47.471 46.339,47.471 46.339,47.511 45.339,47.511 45.339,47.331 46.339,47.331 46.339,47.371 47.469,47.371 47.469,46.671 48.439,46.671 48.439,47.371 49.669,47.371 49.669,46.671 50.639,46.671 50.639,47.371 52.07,47.371 52.07,47.271 51.869,47.271 51.869,46.671 52.789,46.671 52.789,48.171 51.869,48.171 51.869,47.571 52.07,47.571 52.07,47.471 50.639,47.471 50.639,48.171
GND on Top Layer "TOP-GND 3" (solid, pour order 4): 50.639,53.871 49.669,53.871 49.669,53.171 48.439,53.171 48.439,53.871 47.469,53.871 47.469,53.171 46.339,53.171 46.339,53.211 45.339,53.211 45.339,53.031 46.339,53.031 46.339,53.071 47.469,53.071 47.469,52.371 48.439,52.371 48.439,53.071 49.669,53.071 49.669,52.371 50.639,52.371 50.639,53.071 52.07,53.071 52.07,52.971 51.869,52.971 51.869,52.371 52.789,52.371 52.789,53.871 51.869,53.871 51.869,53.271 52.07,53.271 52.07,53.171 50.639,53.171 50.639,53.871
GND on Top Layer "TOP-GND 4" (solid, pour order 5): 50.639,44.371 49.669,44.371 49.669,43.671 48.439,43.671 48.439,44.371 47.469,44.371 47.469,43.671 46.339,43.671 46.339,43.711 45.339,43.711 45.339,43.531 46.339,43.531 46.339,43.571 47.469,43.571 47.469,42.871 48.439,42.871 48.439,43.571 49.669,43.571 49.669,42.871 50.639,42.871 50.639,43.571 52.07,43.571 52.07,43.471 51.869,43.471 51.869,42.871 52.789,42.871 52.789,44.371 51.869,44.371 51.869,43.771 52.07,43.771 52.07,43.671 50.639,43.671 50.639,44.371
GND on Top Layer "Top Layer-GND 2" (solid, pour order 81): 42.865,45.952 42.831,45.941 42.468,45.893 42.427,45.896 42.387,45.888 42.364,45.893 40.734,45.893 40.727,45.89 40.707,45.893 40.694,45.893 40.671,45.888 40.631,45.896 40.591,45.893 40.641,45.843 40.796,45.716 40.968,45.624 41.155,45.567 41.355,45.547 42.193,45.547 42.312,45.563 42.409,45.603 42.487,45.663 42.491,45.669 42.518,45.687 42.527,45.694 42.552,45.722 42.828,45.935
GND on Top Layer "Top Layer-GND 3" (solid, pour order 80): 197 vertices, not listed, extent 37.808,44.111 46.055,48.216
no net on Top Layer "NONET_L01_P073" (solid, pour order 73): 37.617,50.927 37.827,51.136 38.489,51.136
GND on Top Layer "Top Layer-GND" (solid, pour order 71): 36.032,36.576 36.039,36.499 36.143,36.157 36.312,35.841 36.532,35.573 36.542,35.566 36.847,35.261 36.853,35.251 37.121,35.032 37.437,34.863 37.78,34.759 37.854,34.751 37.56,34.841 37.506,34.869 37.448,34.887 37.168,35.037 37.121,35.075 37.067,35.104 36.822,35.305 36.811,35.319 36.774,35.343 36.757,35.369 36.733,35.389 36.426,35.762 36.397,35.816 36.359,35.863 36.131,36.289 36.113,36.348 36.084,36.402
TX1 on Top Layer "TOP-TX1" (solid, pour order 50): 50.625,41.076 49.655,41.076 49.655,40.376 48.425,40.376 48.425,41.076 47.455,41.076 47.455,40.376 46.325,40.376 46.325,40.416 45.325,40.416 45.325,40.236 46.325,40.236 46.325,40.276 47.455,40.276 47.455,39.576 48.425,39.576 48.425,40.276 49.655,40.276 49.655,39.576 50.625,39.576 50.625,40.276 52.056,40.276 52.056,40.176 51.855,40.176 51.855,39.576 52.775,39.576 52.775,41.076 51.855,41.076 51.855,40.476 52.056,40.476 52.056,40.376 50.625,40.376 50.625,41.076
TX3 on Top Layer "TOP-TX3" (solid, pour order 48): 50.625,33.476 49.655,33.476 49.655,32.776 48.425,32.776 48.425,33.476 47.455,33.476 47.455,32.776 46.325,32.776 46.325,32.816 45.325,32.816 45.325,32.636 46.325,32.636 46.325,32.676 47.455,32.676 47.455,31.976 48.425,31.976 48.425,32.676 49.655,32.676 49.655,31.976 50.625,31.976 50.625,32.676 52.056,32.676 52.056,32.576 51.855,32.576 51.855,31.976 52.775,31.976 52.775,33.476 51.855,33.476 51.855,32.876 52.056,32.876 52.056,32.776 50.625,32.776 50.625,33.476
NetC1_1 on Top Layer "NETC1_1_L01_P019" (solid, pour order 19): 37.668,43.84 38.1,43.84 38.1,42.139 38.252,41.986 38.252,40.945 38.76,40.437 39.319,40.437 39.319,39.065 37.567,39.065 37.567,41.173 37.567,41.935 37.668,42.037
TX2 on Top Layer "TOP-TX2" (solid, pour order 49): 52.525,37.276 51.555,37.276 51.555,36.576 50.325,36.576 50.325,37.276 49.355,37.276 49.355,36.576 48.225,36.576 48.225,36.616 47.225,36.616 47.225,36.436 48.225,36.436 48.225,36.476 49.355,36.476 49.355,35.776 50.325,35.776 50.325,36.476 51.555,36.476 51.555,35.776 52.525,35.776 52.525,36.476 53.956,36.476 53.956,36.376 53.755,36.376 53.755,35.776 54.675,35.776 54.675,37.276 53.755,37.276 53.755,36.676 53.956,36.676 53.956,36.576 52.525,36.576 52.525,37.276
GND on Top Layer "GND_L01_P012" (solid, pour order 12): 31.648,50.063 37.008,50.063 37.008,44.501 31.648,44.501
GND on Top Layer "NONET_L01_P010" (solid, shelved, pour order 10): 29.464,36.703 29.464,32.004 29.591,31.877 29.464,31.75 29.464,28.575 37.211,28.575 37.846,29.21 37.846,36.576
GND on Layer 1 "GND_L02_P015" (solid, pour order 15): 25.41,25.4 60.528,25.4 60.528,60.985 25.41,60.985 25.41,55.464

## Keep-outs
Keep-Out Layer:
  lines w0.254: 25.121,25.095 25.146,25.121 25.146,61.468 25.451,61.468 60.909,61.468 60.909,25.095 25.121,25.095

## Other copper
Top Layer:
  pour cut-out: 38.79,46.497 38.803,46.498 39.139,46.454 39.164,46.446 39.19,46.44 39.503,46.311 39.525,46.296 39.549,46.284 39.818,46.078 39.826,46.068 39.838,46.061 39.848,46.044 40.349,45.543 40.352,45.539 40.563,45.366 40.808,45.236 41.073,45.155 41.345,45.128 41.349,45.129 42.208,45.129 42.213,45.128 42.421,45.156 42.62,45.238 42.777,45.358 42.787,45.373 42.798,45.381 42.806,45.391 43.083,45.603 43.107,45.614 43.129,45.629 43.451,45.763 43.477,45.768 43.502,45.776 43.847,45.822 43.861,45.821 43.874,45.823 43.894,45.819 45.339,45.819 45.416,45.804 45.484,45.776 45.55,45.732 45.567,45.706 45.594,45.666 45.622,45.598 45.637,45.521 45.622,45.444 45.594,45.376 45.55,45.31 45.524,45.293 45.484,45.266 45.416,45.238 45.339,45.223 43.874,45.223 43.866,45.224 43.631,45.194 43.404,45.1 43.223,44.961 43.213,44.946 43.207,44.942 43.203,44.937 43.198,44.933 43.194,44.929 42.941,44.735 42.917,44.723 42.895,44.709 42.601,44.587 42.575,44.581 42.55,44.573 42.234,44.531 42.221,44.532 42.208,44.53 42.192,44.533 41.356,44.533 41.349,44.531 41.34,44.533 41.33,44.532 40.976,44.567 40.957,44.573 40.938,44.575 40.598,44.678 40.58,44.687 40.561,44.693 40.248,44.86 40.233,44.873 40.216,44.882 39.941,45.107 39.935,45.115 39.927,45.121 39.923,45.127 39.413,45.636 39.409,45.642 39.228,45.781 39.01,45.871 38.784,45.901 38.777,45.9 38.699,45.915 38.631,45.943 38.592,45.97 38.566,45.987 38.522,46.053 38.494,46.121 38.478,46.198 38.494,46.275 38.522,46.343 38.548,46.383 38.566,46.409 38.631,46.453 38.684,46.475 38.699,46.485 38.712,46.487 38.724,46.493 38.751,46.495 38.777,46.5
  pour cut-out: 38.534,47.796 38.544,47.797 38.902,47.762 38.921,47.756 38.941,47.754 39.284,47.65 39.302,47.64 39.321,47.634 39.638,47.465 39.653,47.452 39.671,47.443 39.948,47.215 39.955,47.208 39.963,47.202 39.971,47.19 40.168,47.039 40.41,46.938 40.661,46.905 40.671,46.907 42.387,46.907 42.397,46.905 42.648,46.938 42.89,47.039 43.09,47.192 43.096,47.201 43.104,47.207 43.111,47.214 43.348,47.409 43.366,47.419 43.381,47.431 43.652,47.576 43.671,47.582 43.689,47.592 43.983,47.681 44.003,47.683 44.022,47.689 44.328,47.719 44.338,47.718 44.348,47.72 44.349,47.719 45.339,47.719 45.416,47.704 45.484,47.676 45.55,47.632 45.567,47.606 45.594,47.567 45.594,47.566 45.622,47.498 45.637,47.421 45.622,47.344 45.594,47.276 45.55,47.21 45.524,47.193 45.484,47.166 45.416,47.138 45.339,47.123 44.348,47.123 44.334,47.126 44.043,47.087 43.759,46.97 43.539,46.801 43.536,46.798 43.521,46.776 43.515,46.772 43.511,46.766 43.505,46.763 43.501,46.758 43.211,46.536 43.187,46.524 43.165,46.509 42.827,46.369 42.801,46.364 42.776,46.356 42.414,46.308 42.4,46.309 42.387,46.306 42.364,46.311 40.702,46.311 40.689,46.307 40.68,46.308 40.671,46.306 40.658,46.309 40.644,46.308 40.282,46.356 40.257,46.364 40.231,46.369 39.893,46.509 39.871,46.524 39.847,46.536 39.557,46.758 39.548,46.768 39.537,46.776 39.525,46.794 39.323,46.959 39.075,47.092 38.805,47.174 38.53,47.201 38.525,47.2 38.509,47.203 38.505,47.203 38.501,47.205 38.447,47.215 38.379,47.243 38.34,47.27 38.314,47.287 38.27,47.353 38.242,47.421 38.226,47.498 38.242,47.575 38.27,47.643 38.296,47.683 38.314,47.709 38.379,47.753 38.441,47.778 38.447,47.782 38.457,47.784 38.466,47.789 38.495,47.792 38.525,47.798
  pour cut-out: 42.382,50.209 43.578,50.209 43.583,50.21 43.596,50.208 43.609,50.208 43.859,50.176 43.884,50.167 43.91,50.162 44.142,50.066 44.164,50.051 44.188,50.039 44.388,49.886 44.396,49.876 44.408,49.869 44.412,49.861 44.582,49.731 44.787,49.646 45.001,49.618 45.007,49.619 45.484,49.619 45.561,49.604 45.629,49.576 45.695,49.532 45.713,49.506 45.739,49.466 45.767,49.398 45.782,49.321 45.767,49.244 45.739,49.176 45.695,49.11 45.669,49.093 45.629,49.066 45.561,49.038 45.484,49.023 45.024,49.023 45.007,49.02 44.994,49.022 44.981,49.021 44.658,49.064 44.633,49.072 44.607,49.077 44.306,49.202 44.284,49.217 44.261,49.228 44.003,49.426 43.994,49.436 43.983,49.444 43.978,49.451 43.867,49.536 43.73,49.593 43.579,49.613 42.374,49.613 42.369,49.614 42.094,49.587 41.824,49.505 41.576,49.372 41.37,49.203 41.361,49.19 41.353,49.184 41.346,49.177 41.018,48.907 41.001,48.898 40.985,48.885 40.611,48.685 40.592,48.68 40.575,48.67 40.168,48.547 40.149,48.545 40.13,48.539 39.707,48.498 39.697,48.499 39.687,48.497 39.658,48.502 39.629,48.505 39.62,48.51 39.61,48.512 39.598,48.52 39.542,48.543 39.503,48.57 39.477,48.587 39.433,48.653 39.405,48.721 39.389,48.798 39.405,48.875 39.433,48.943 39.459,48.983 39.477,49.009 39.542,49.053 39.61,49.081 39.687,49.096 39.698,49.094 40.033,49.127 40.365,49.228 40.671,49.391 40.927,49.602 40.936,49.615 40.944,49.621 40.951,49.628 41.228,49.856 41.246,49.865 41.261,49.878 41.578,50.047 41.597,50.053 41.615,50.063 41.958,50.167 41.978,50.169 41.997,50.175 42.355,50.21 42.365,50.209 42.374,50.211
  pour cut-out: 34.068,43.881 34.136,43.853 34.202,43.809 34.219,43.783 34.246,43.743 34.274,43.675 34.289,43.598 34.289,35.946 34.286,35.928 34.327,35.508 34.455,35.086 34.663,34.697 34.93,34.371 34.946,34.361 35.627,33.679 35.638,33.664 35.964,33.396 36.352,33.188 36.774,33.06 37.194,33.019 37.212,33.023 37.29,33.007 37.358,32.979 37.397,32.953 37.423,32.935 37.467,32.87 37.495,32.802 37.511,32.724 37.495,32.647 37.467,32.579 37.441,32.54 37.423,32.514 37.358,32.47 37.293,32.443 37.29,32.441 37.282,32.439 37.275,32.435 37.243,32.432 37.212,32.425 37.205,32.427 37.197,32.426 36.784,32.459 36.769,32.463 36.753,32.463 36.35,32.56 36.336,32.567 36.32,32.57 35.938,32.728 35.925,32.737 35.91,32.743 35.557,32.959 35.545,32.97 35.531,32.977 35.217,33.246 35.212,33.253 35.205,33.257 35.203,33.26 34.527,33.936 34.524,33.938 34.519,33.945 34.513,33.95 34.244,34.265 34.236,34.279 34.225,34.29 34.009,34.643 34.004,34.658 33.995,34.671 33.836,35.054 33.833,35.069 33.827,35.084 33.73,35.486 33.729,35.502 33.725,35.518 33.693,35.93 33.694,35.938 33.692,35.946 33.693,35.95 33.693,43.598 33.708,43.675 33.736,43.743 33.78,43.809 33.806,43.826 33.846,43.853 33.914,43.881 33.991,43.896
  pour cut-out: 35.368,43.881 35.436,43.853 35.502,43.809 35.519,43.783 35.546,43.743 35.574,43.675 35.589,43.598 35.589,36.856 35.586,36.837 35.627,36.417 35.755,35.996 35.963,35.607 36.23,35.281 36.246,35.271 36.551,34.965 36.561,34.95 36.888,34.682 37.276,34.474 37.698,34.347 38.118,34.305 38.136,34.309 42.356,34.309 42.375,34.305 42.795,34.347 43.216,34.474 43.605,34.682 43.931,34.95 43.942,34.965 44.968,35.992 45.034,36.036 45.102,36.064 45.179,36.079 45.257,36.064 45.325,36.036 45.39,35.992 45.408,35.966 45.434,35.927 45.462,35.859 45.477,35.781 45.462,35.704 45.434,35.636 45.39,35.57 44.366,34.547 44.364,34.543 44.357,34.539 44.352,34.532 44.038,34.264 44.024,34.256 44.012,34.245 43.659,34.029 43.644,34.023 43.631,34.014 43.249,33.856 43.233,33.853 43.219,33.846 42.816,33.75 42.8,33.749 42.785,33.745 42.372,33.712 42.364,33.713 42.356,33.712 42.352,33.712 38.14,33.712 38.136,33.712 38.128,33.713 38.12,33.712 37.708,33.745 37.692,33.749 37.676,33.75 37.274,33.846 37.26,33.853 37.244,33.856 36.862,34.014 36.848,34.023 36.833,34.029 36.481,34.245 36.469,34.256 36.455,34.264 36.14,34.532 36.135,34.539 36.129,34.543 36.126,34.547 35.827,34.846 35.824,34.848 35.819,34.855 35.813,34.86 35.544,35.175 35.536,35.188 35.525,35.2 35.309,35.553 35.304,35.568 35.295,35.581 35.136,35.964 35.133,35.979 35.127,35.994 35.03,36.396 35.029,36.412 35.025,36.427 34.993,36.84 34.994,36.848 34.992,36.856 34.993,36.86 34.993,43.598 35.008,43.675 35.036,43.743 35.08,43.809 35.106,43.826 35.146,43.853 35.214,43.881 35.291,43.896
  pour cut-out: 172 vertices and 0 holes, not listed, extent 36.288,35.109 45.676,43.896
Layer 1:
  pour cut-out: 33.745,43.7 33.802,43.787 33.889,43.844 33.991,43.865 34.093,43.844 34.18,43.787 34.237,43.7 34.258,43.598 34.237,43.496 34.18,43.409 34.093,43.352 33.991,43.331 33.889,43.352 33.802,43.409 33.745,43.496 33.724,43.598
  pour cut-out: 35.045,43.7 35.102,43.787 35.189,43.844 35.291,43.865 35.393,43.844 35.48,43.787 35.537,43.7 35.558,43.598 35.537,43.496 35.48,43.409 35.393,43.352 35.291,43.331 35.189,43.352 35.102,43.409 35.045,43.496 35.024,43.598
  pour cut-out: 36.345,43.7 36.402,43.787 36.489,43.844 36.591,43.865 36.693,43.844 36.78,43.787 36.837,43.7 36.858,43.598 36.837,43.496 36.78,43.409 36.693,43.352 36.591,43.331 36.489,43.352 36.402,43.409 36.345,43.496 36.324,43.598
  pour cut-out: 37.645,46.3 37.702,46.387 37.789,46.444 37.891,46.465 37.993,46.444 38.08,46.387 38.137,46.3 38.158,46.198 38.137,46.096 38.08,46.009 37.993,45.952 37.891,45.931 37.789,45.952 37.702,46.009 37.645,46.096 37.624,46.198
  pour cut-out: 37.645,47.6 37.702,47.687 37.789,47.744 37.891,47.765 37.993,47.744 38.08,47.687 38.137,47.6 38.158,47.498 38.137,47.396 38.08,47.309 37.993,47.252 37.891,47.231 37.789,47.252 37.702,47.309 37.645,47.396 37.624,47.498
  pour cut-out: 37.645,48.9 37.702,48.987 37.789,49.044 37.891,49.065 37.993,49.044 38.08,48.987 38.137,48.9 38.158,48.798 38.137,48.696 38.08,48.609 37.993,48.552 37.891,48.531 37.789,48.552 37.702,48.609 37.645,48.696 37.624,48.798
  pour cut-out: 37.645,50.2 37.702,50.287 37.789,50.344 37.891,50.365 37.993,50.344 38.08,50.287 38.137,50.2 38.158,50.098 38.137,49.996 38.08,49.909 37.993,49.852 37.891,49.831 37.789,49.852 37.702,49.909 37.645,49.996 37.624,50.098

## Silkscreen, mask and mechanical layers (free items; w line width, h text height)
Top Solder:
  rectangle: 32.918,26.467 44.018,35.941
  rectangle: 32.995,35.433 37.338,42.393
  rectangle: 40.437,43.155 60.935,54.661
  rectangle: 41.758,26.467 60.884,46.38
  rectangle: 39.319,51.206 60.833,59.258